# EAGLE board voice-card-controller-1_2-w-thru-hole-xtal (EAGLE 7.2.0)
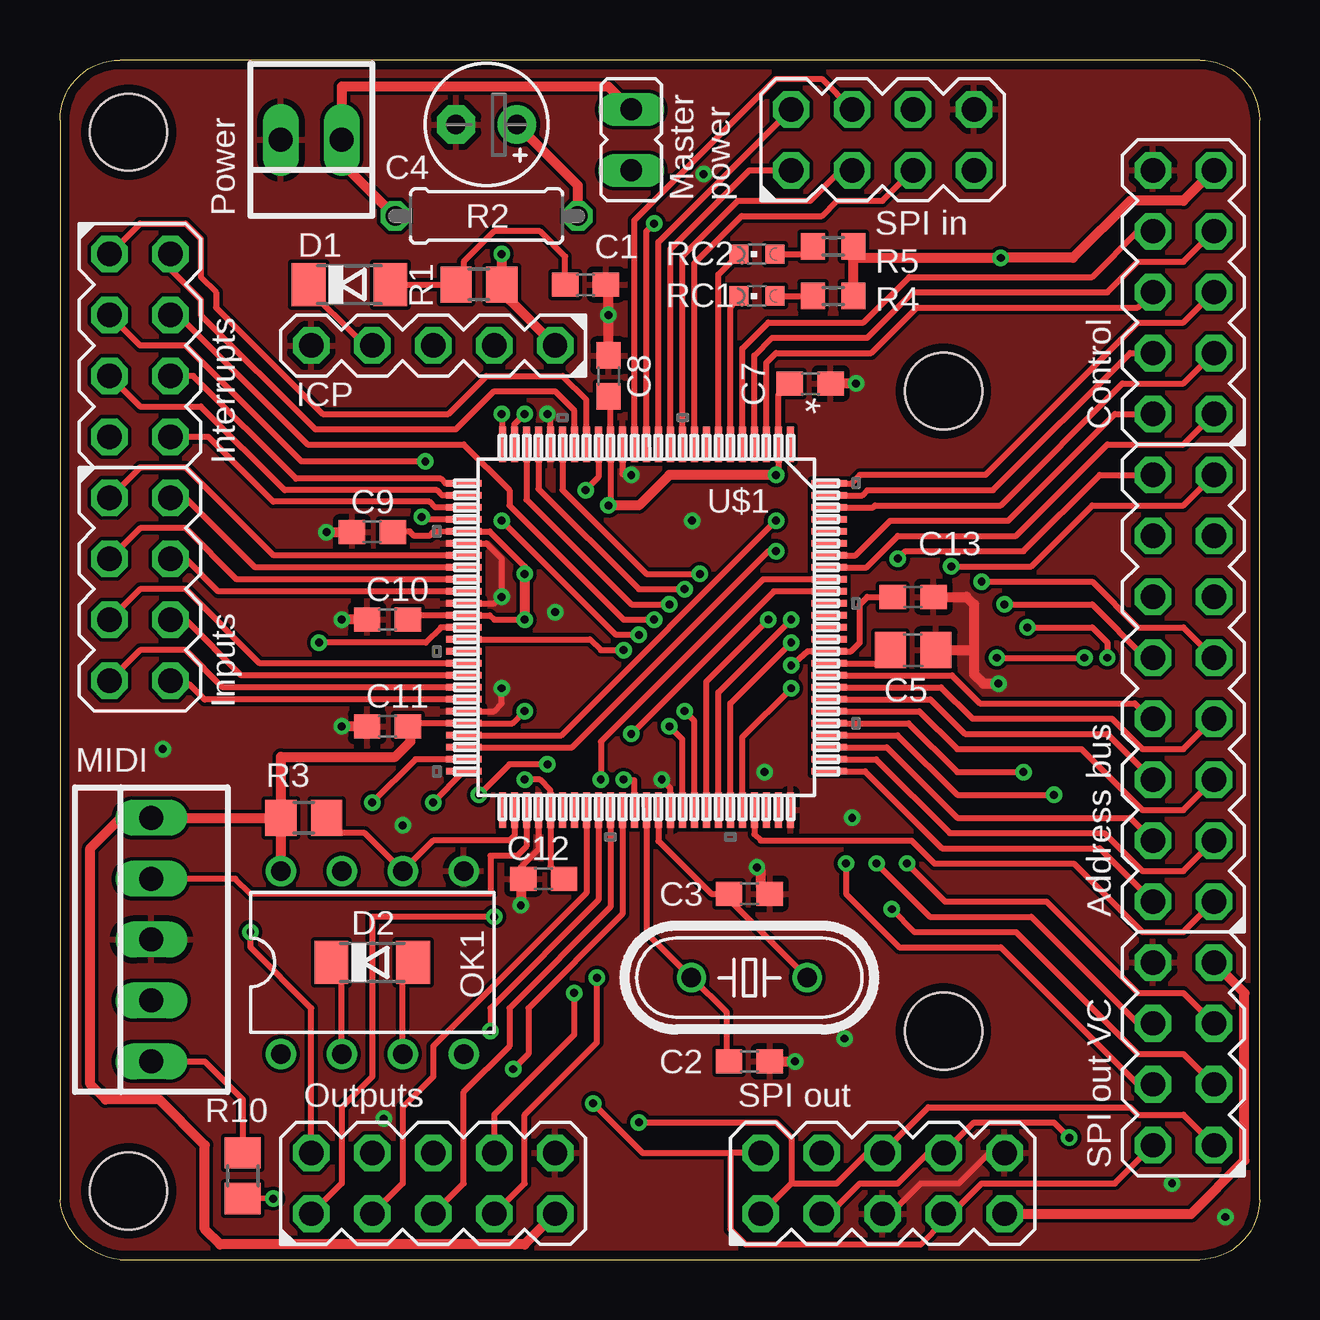
[diagram p0: board, top side]
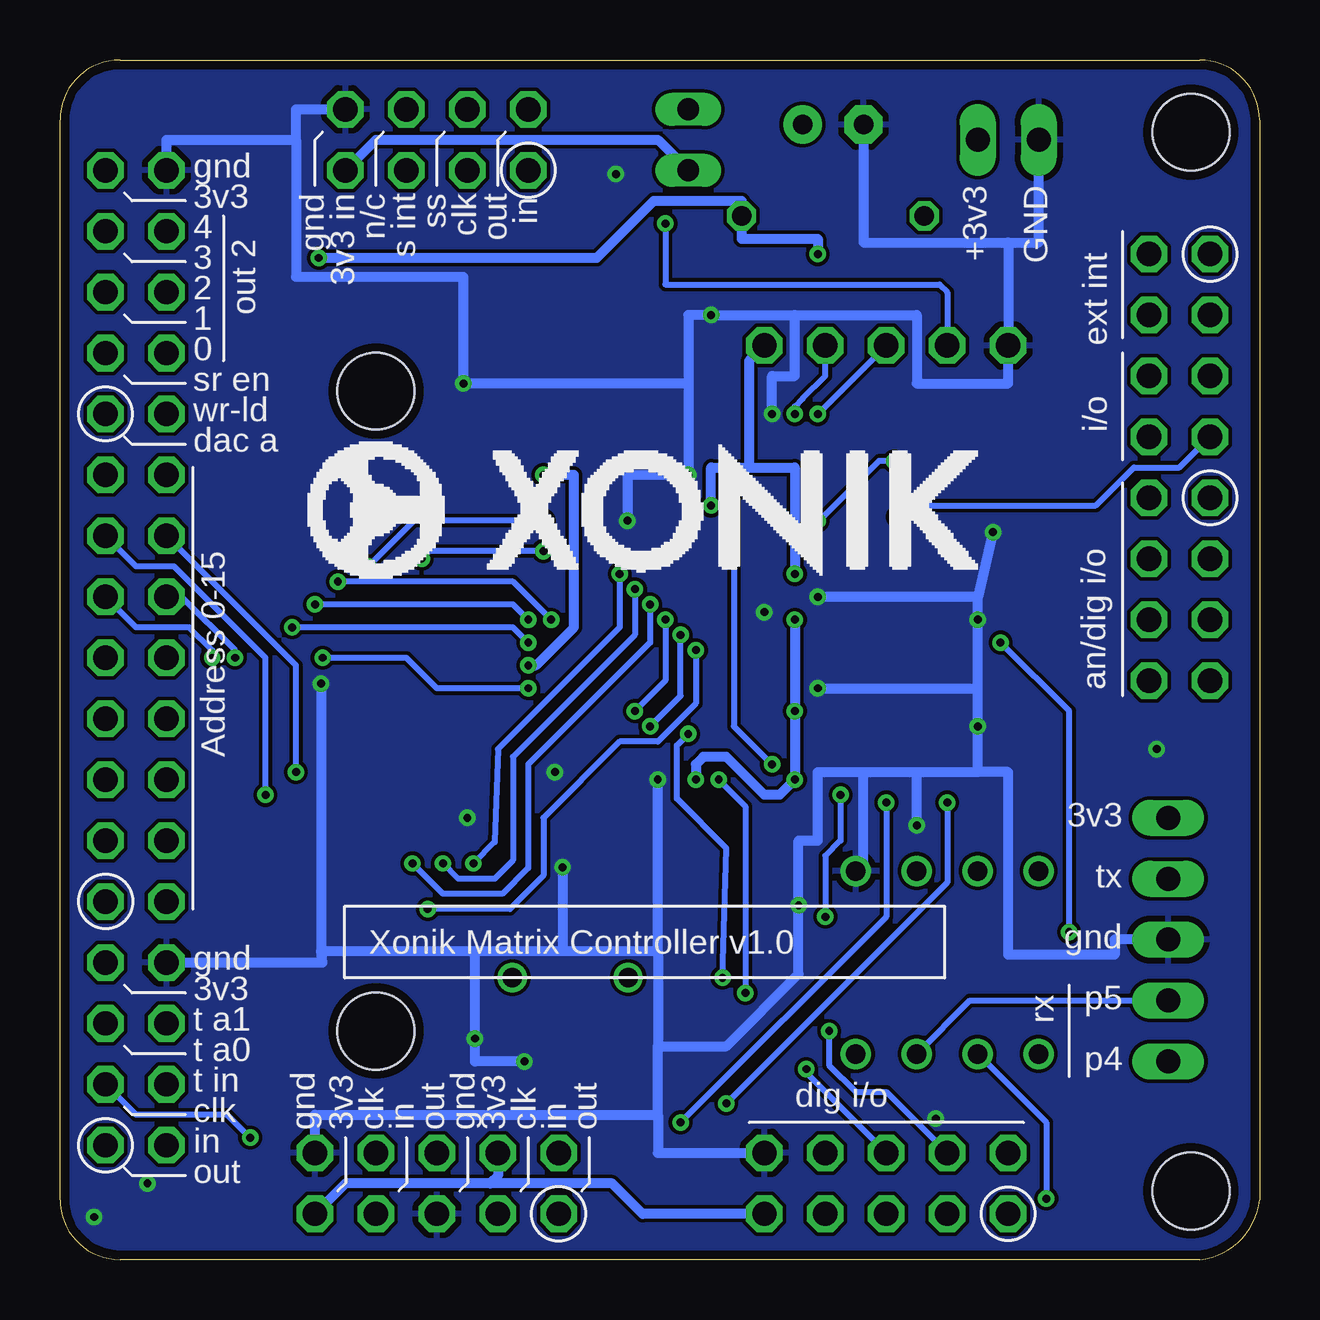
[diagram p1: board, bottom side, seen from below]

Size 50 x 50 mm. Coordinates in mm from the lower left corner, seen from the top.
Outline: 2.5,0 47.5,0 arc90 50,2.5 50,47.5 arc90 47.5,50 2.5,50 arc90 0,47.5 0,2.5 arc80 2.5,0
Copper layers (1*16): Top 0.0356mm / dielectric 1.5011mm / Bottom 0.0356mm
Design rules "oshpark-2layer": minimum track width 6mil, minimum drill 13mil, track to track 6mil, track to pad 6mil, pad to pad 6mil, via to via 6mil, smd to smd 6mil, copper to edge 15mil, drill to drill 6mil, minimum pad ring 7mil, minimum via ring 7mil, stop-mask expansion 2.5mil, vias tented up to drill 0mil, thermal gap 10mil
Holes 3.2 mm at 2.86,46.99 36.83,36.2 36.83,9.53 2.86,2.86

## Footprints (pad centres in the part's own frame; a part is rotated, then mirrored left to right if it is on the bottom)
C0603 = smd 1.1 x 1: 1 -0.85,0; 2 0.85,0
E2,5-5 = drill 0.813 pad 1.6: + -1.27,0 | drill 0.813 pad 1.6 octagon: - 1.27,0
C0805 = smd 1.3 x 1.5: 1 -0.95,0; 2 0.95,0
SOD80C = smd 1.4 x 1.8: A 1.7,0; C -1.7,0
MA08-2J = drill 1.016 octagon: 1 -8.89,-1.27; 2 -8.89,1.27; 3 -6.35,-1.27; 4 -6.35,1.27; 5 -3.81,-1.27; 6 -3.81,1.27; 7 -1.27,-1.27; 8 -1.27,1.27; 9 1.27,-1.27; 10 1.27,1.27; 11 3.81,-1.27; 12 3.81,1.27; 13 6.35,-1.27; 14 6.35,1.27; 15 8.89,-1.27; 16 8.89,1.27
MA05-2J = drill 1.016 octagon: 1 -5.08,-1.27; 2 -5.08,1.27; 3 -2.54,-1.27; 4 -2.54,1.27; 5 0,-1.27; 6 0,1.27; 7 2.54,-1.27; 8 2.54,1.27; 9 5.08,-1.27; 10 5.08,1.27
MA04-2J = drill 1.016 octagon: 1 -3.81,-1.27; 2 -3.81,1.27; 3 -1.27,-1.27; 4 -1.27,1.27; 5 1.27,-1.27; 6 1.27,1.27; 7 3.81,-1.27; 8 3.81,1.27
MA05-1 = drill 1.016 octagon: 1 -5.08,0; 2 -2.54,0; 3 0,0; 4 2.54,0; 5 5.08,0
JP1 = drill 0.914 long: 1 0,-1.27; 2 0,1.27
CHIPLED_0603 = smd 0.8 x 0.8: A 0,-0.75; C 0,0.75
22-23-2051 = drill 1 long: 1 -5.08,0; 2 -2.54,0; 3 0,0; 4 2.54,0; 5 5.08,0
DIL08-J = drill 0.813 pad 1.27: 1 -3.81,-3.81; 2 -1.27,-3.81; 3 1.27,-3.81; 4 3.81,-3.81; 5 3.81,3.81; 6 1.27,3.81; 7 -1.27,3.81; 8 -3.81,3.81
22-23-2021 = drill 1 long: 1 -1.27,0; 2 1.27,0
HC49/S = drill 0.813: 1 -2.413,0; 2 2.413,0
R0805 = smd 1.3 x 1.5: 1 -0.95,0; 2 0.95,0
0207/7 = drill 0.813 octagon: 1 -3.81,0; 2 3.81,0
R0603 = smd 1 x 1.1: 1 -0.85,0; 2 0.85,0
TQFP100_14X14MC = smd 1.473 x 0.279: 1 -7.62,6; 2 -7.62,5.5; 3 -7.62,5; 4 -7.62,4.5; 5 -7.62,4; 6 -7.62,3.5; 7 -7.62,3; 8 -7.62,2.5; 9 -7.62,2; 10 -7.62,1.5; 11 -7.62,1; 12 -7.62,0.5; 13 -7.62,0; 14 -7.62,-0.5; 15 -7.62,-1; 16 -7.62,-1.5; 17 -7.62,-2; 18 -7.62,-2.5; 19 -7.62,-3; 20 -7.62,-3.5; 21 -7.62,-4; 22 -7.62,-4.5; 23 -7.62,-5; 24 -7.62,-5.5; 25 -7.62,-6; 51 7.62,-6; 52 7.62,-5.5; 53 7.62,-5; 54 7.62,-4.5; 55 7.62,-4; 56 7.62,-3.5; 57 7.62,-3; 58 7.62,-2.5; 59 7.62,-2; 60 7.62,-1.5; 61 7.62,-1; 62 7.62,-0.5; 63 7.62,0; 64 7.62,0.5; 65 7.62,1; 66 7.62,1.5; 67 7.62,2; 68 7.62,2.5; 69 7.62,3; 70 7.62,3.5; 71 7.62,4; 72 7.62,4.5; 73 7.62,5; 74 7.62,5.5; 75 7.62,6 | smd 0.279 x 1.473: 26 -6,-7.62; 27 -5.5,-7.62; 28 -5,-7.62; 29 -4.5,-7.62; 30 -4,-7.62; 31 -3.5,-7.62; 32 -3,-7.62; 33 -2.5,-7.62; 34 -2,-7.62; 35 -1.5,-7.62; 36 -1,-7.62; 37 -0.5,-7.62; 38 0,-7.62; 39 0.5,-7.62; 40 1,-7.62; 41 1.5,-7.62; 42 2,-7.62; 43 2.5,-7.62; 44 3,-7.62; 45 3.5,-7.62; 46 4,-7.62; 47 4.5,-7.62; 48 5,-7.62; 49 5.5,-7.62; 50 6,-7.62; 76 6,7.62; 77 5.5,7.62; 78 5,7.62; 79 4.5,7.62; 80 4,7.62; 81 3.5,7.62; 82 3,7.62; 83 2.5,7.62; 84 2,7.62; 85 1.5,7.62; 86 1,7.62; 87 0.5,7.62; 88 0,7.62; 89 -0.5,7.62; 90 -1,7.62; 91 -1.5,7.62; 92 -2,7.62; 93 -2.5,7.62; 94 -3,7.62; 95 -3.5,7.62; 96 -4,7.62; 97 -4.5,7.62; 98 -5,7.62; 99 -5.5,7.62; 100 -6,7.62

## Placement (x,y rotation side)
C1  100nF  [C0603]  21.91,40.64 180 top
C2  18pF  [C0603]  28.73,8.26 0 top
C3  18pF  [C0603]  28.73,15.24 0 top
C4  22uF 25V  [E2,5-5]  17.78,47.31 180 top
C5  10uF  [C0805]  35.56,25.4 180 top
C7  100nF  [C0603]  31.27,36.51 180 top
C8  100nF  [C0603]  22.86,36.83 270 top
C9  100nF  [C0603]  13.02,30.32 0 top
C10  100nF  [C0603]  13.65,26.67 0 top
C11  100nF  [C0603]  13.65,22.23 0 top
C12  100nF  [C0603]  20.16,15.88 0 top
C13  100nF  [C0603]  35.56,27.62 180 top
D1  [SOD80C]  12.06,40.64 0 top
D2  [SOD80C]  13.02,12.38 0 top
DAC-ADR  [MA08-2J]  46.83,23.81 90 top
DAC-CTRL  [MA05-2J]  46.83,40.32 90 top
DIG-IN  [MA04-2J]  3.33,27.94 270 top
DIG-OUT  [MA05-2J]  15.56,3.17 0 top
ICP  [MA05-1]  15.56,38.1 180 top
INTERRUPTS  [MA04-2J]  3.33,38.1 270 top
JP1  [JP1]  23.81,46.67 0 top
LED1  [CHIPLED_0603]  29.05,40.16 90 top
LED2  [CHIPLED_0603]  29.05,41.91 90 top
MIDI  22-23-2051  [22-23-2051]  3.81,13.34 90 top
OK1  6N137J  [DIL08-J]  13.02,12.38 0 top
POWER  22-23-2021  [22-23-2021]  10.48,46.67 180 top
Q4  [HC49/S]  28.73,11.75 180 top
R1  10k  [R0805]  17.46,40.64 0 top
R2  10R  [0207/7]  17.78,43.5 180 top
R3  220R  [R0805]  10.16,18.41 180 top
R4  220R  [R0603]  32.23,40.16 0 top
R5  220R  [R0603]  32.23,42.23 0 top
R10  220R  [R0805]  7.62,3.49 270 top
SPI-IN  [MA04-2J]  34.29,46.67 0 top
SPI-OUT  [MA05-2J]  34.29,3.17 0 top
SPI-OUT-VC  [MA04-2J]  46.83,8.57 90 top
U$1  PIC32MX795F512L-X_PF  [TQFP100_14X14MC]  24.45,26.35 270 top

## Library data of the parts
C1-C5 C7-C13 R1-R5 R10 = resistor
D1 D2 = diode
DAC-ADR DAC-CTRL DIG-IN DIG-OUT ICP INTERRUPTS SPI-IN SPI-OUT SPI-OUT-VC = joakim; OC_FARNELL: unknown; OC_NEWARK: unknown
JP1 = jumper
LED1 LED2 = led
MIDI = con-molex; MF: MOLEX; MPN: 22-23-2051; OC_FARNELL: 1462952; OC_NEWARK: 38C9178
OK1 = joakim
POWER = con-molex; MF: MOLEX; MPN: 22-23-2021; OC_FARNELL: 1462926; OC_NEWARK: 25C3832
Q4 = crystal; OC_FARNELL: 1667008; OC_NEWARK: unknown
U$1 = pic32mx-795F-512L

## Nets
+3V3: C4.+ C7.2 C8.2 C9.2 C10.2 C11.2 C12.2 C13.2 DAC-CTRL.9 DIG-OUT.9 ICP.1 MIDI.5 OK1.8 R1.2 R2.1 R3.2 R4.2 R5.2 SPI-OUT-VC.7 SPI-OUT.4 SPI-OUT.9 U$1.2 U$1.16 U$1.30 U$1.37 U$1.46 U$1.55 U$1.62 U$1.86
DAC-A: DAC-CTRL.1 U$1.93
DAC-A0: DAC-ADR.1 U$1.72
DAC-A1: DAC-ADR.2 U$1.76
DAC-A2: DAC-ADR.3 U$1.77
DAC-A3: DAC-ADR.4 U$1.78
DAC-A4: DAC-ADR.5 U$1.81
DAC-A5: DAC-ADR.6 U$1.82
DAC-A6: DAC-ADR.7 U$1.83
DAC-A7: DAC-ADR.8 U$1.84
DAC-A8: DAC-ADR.9 U$1.68
DAC-A9: DAC-ADR.10 U$1.69
DAC-A10: DAC-ADR.11 U$1.70
DAC-A11: DAC-ADR.12 U$1.71
DAC-A12: DAC-ADR.13 U$1.79
DAC-A13: DAC-ADR.14 U$1.80
DAC-A14: DAC-ADR.15 U$1.47
DAC-A15: DAC-ADR.16 U$1.48
DAC-WR-LD: DAC-CTRL.2 U$1.94
DIG-IN0: DIG-IN.1 U$1.32
DIG-IN1: DIG-IN.2 U$1.33
DIG-IN2: DIG-IN.3 U$1.34
DIG-IN2-0: INTERRUPTS.5 U$1.27
DIG-IN2-1: INTERRUPTS.6 U$1.26
DIG-IN2-2: INTERRUPTS.7 U$1.29
DIG-IN2-3: INTERRUPTS.8 U$1.28
DIG-IN3: DIG-IN.4 U$1.35
DIG-IN4: DIG-IN.5 U$1.41
DIG-IN5: DIG-IN.6 U$1.42
DIG-IN6: DIG-IN.7 U$1.43
DIG-IN7: DIG-IN.8 U$1.44
DIG-OUT0: DIG-OUT.1 U$1.17
DIG-OUT1: DIG-OUT.2 U$1.38
DIG-OUT2: DIG-OUT.3 U$1.58
DIG-OUT2-0: DAC-CTRL.4 U$1.99
DIG-OUT2-1: DAC-CTRL.5 U$1.100
DIG-OUT2-2: DAC-CTRL.6 U$1.3
DIG-OUT2-3: DAC-CTRL.7 U$1.4
DIG-OUT2-4: DAC-CTRL.8 U$1.5
DIG-OUT3: DIG-OUT.4 U$1.59
DIG-OUT4: DIG-OUT.5 U$1.60
DIG-OUT5: DIG-OUT.6 U$1.61
DIG-OUT6: DIG-OUT.7 U$1.91
DIG-OUT7: DIG-OUT.8 U$1.92
GND: C1.1 C2.2 C3.2 C4.- C5.1 C7.1 C8.1 C9.1 C10.1 C11.1 C12.1 C13.1 DAC-CTRL.10 DIG-OUT.10 ICP.5 MIDI.3 OK1.5 POWER.2 SPI-IN.8 SPI-OUT-VC.8 SPI-OUT.5 SPI-OUT.10 U$1.15 U$1.21 U$1.31 U$1.36 U$1.45 U$1.54 U$1.65 U$1.75
INT1: INTERRUPTS.1 U$1.18
INT2: INTERRUPTS.2 U$1.19
INT3: INTERRUPTS.3 U$1.66
INT4: INTERRUPTS.4 U$1.67
MCLR: D1.C ICP.4 U$1.13
MIDI-IN4: MIDI.1 R10.1
MIDI-IN5: D2.A MIDI.2 OK1.3
MIDI-RX: OK1.6 R3.1 U$1.52
MIDI-TX: MIDI.4 U$1.53
N$1: C5.2 U$1.85
N$2: JP1.1 SPI-IN.7
N$3: LED1.A R4.1
N$4: C1.2 D1.A R1.1
N$5: D2.C OK1.2 R10.2
N$6: LED1.C U$1.6
N$7: LED2.C U$1.7
N$8: LED2.A R5.1
OSC1: C2.1 Q4.2 U$1.63
OSC2: C3.1 Q4.1 U$1.64
PGC: ICP.2 U$1.24
PGD: ICP.3 U$1.25
POWER-IN: JP1.2 POWER.1 R2.2
SCLK-IN: SPI-IN.3 U$1.10
SCLK-OUT: SPI-OUT-VC.3 SPI-OUT.3 SPI-OUT.8 U$1.39
SDI-IN: SPI-IN.1 U$1.11
SDI-OUT: SPI-OUT-VC.2 SPI-OUT.2 SPI-OUT.7 U$1.49
SDO-IN: SPI-IN.2 U$1.12
SDO-OUT: SPI-OUT-VC.1 SPI-OUT.1 SPI-OUT.6 U$1.50
SLAVE-INT: SPI-IN.5 U$1.9
SR-EN: DAC-CTRL.3 U$1.98
SS-IN: SPI-IN.4 U$1.14
TUNE-A0: SPI-OUT-VC.5 U$1.23
TUNE-A1: SPI-OUT-VC.6 U$1.22
TUNE-IN: SPI-OUT-VC.4 U$1.20

## Tracks (layer width: path | path; a pad name or v marks a point on that pad's centre or on a via)
+3V3  (via drill 0.33)
  Top 0.254: v19.37,28.57 19.37,28.89 17.91,30.35 U$1.30 15.56,30.32 15.4,30.16 14.76,30.16 14.57,30.35 14.5,30.35 C9.2 | C10.2 14.5,26.85 U$1.37 17.91,26.85 18.1,26.67 v19.37,26.67 | C11.2 14.5,22.35 U$1.46 18.86,22.35 v19.37,22.86 | C12.2 20.45,16.38 U$1.55 20.45,19.56 20,20 v19.37,20 | C8.2 22.95,35.89 U$1.16 22.95,31.43 v22.86,31.43 | v29.84,32.7 29.95,32.8 U$1.2 29.95,36.04 C7.2 | U$1.62 23.95,19.98 v23.5,20 | v30.48,24.77 31.16,25.35 U$1.86 32.97,25.35 33.34,25.72 33.34,27.3 33.66,27.62 C13.2
  Top 0.406: DAC-CTRL.9 46.83,44.13 44.61,44.13 42.23,41.75 v39.21,41.75 33.02,41.75 33.08,42.28 R4.2 R5.2 | v29.84,32.7 25.4,32.7 24.13,31.43 v22.86,31.43 | v19.37,28.57 v19.37,26.67 | R3.2 MIDI.5 2.54,18.41 1.27,17.14 1.27,7.3 1.91,6.67 4.13,6.67 6.03,4.76 6.03,1.27 6.67,0.64 19.37,0.64 DIG-OUT.9 | 9.21,18.1 OK1.8 | R3.2 | R3.2 9.21,18.1 | 9.21,18.1 R3.2 | R3.2 9.21,20.95 13.97,20.95 14.61,21.59 14.61,22.12 C11.2 | v18.41,41.91 R1.2 18.73,40.32 18.73,40.01 ICP.1 | R2.1 21.59,44.77 C4.+ | SPI-OUT.9 47.15,1.91 49.37,4.13 49.37,11.11 SPI-OUT-VC.7
  Bottom 0.406: v39.21,41.75 27.62,41.75 25.24,44.13 21.59,44.13 R2.1 21.59,42.55 18.41,42.55 v18.41,41.91 | v30.48,24.77 30.16,24.77 28.57,26.35 28.57,32.7 v29.84,32.7 | v22.86,31.43 22.86,33.02 21.27,33.02 | 21.27,33.02 19.37,33.02 v19.37,28.57 | v19.37,26.67 v19.37,22.86 v19.37,20 20,19.37 20.64,19.37 22.23,20.95 23.18,20.95 23.5,20.64 v23.5,20 | ICP.1 21.27,37.47 21.27,33.02 | DIG-OUT.9 25.72,1.91 26.99,3.17 32.07,3.17 | 32.07,3.17 38.1,3.17 SPI-OUT.9 | SPI-OUT.4 31.75,3.49 32.07,3.17
DAC-A
  Top 0.254: U$1.93 33.62,28.85 34.92,30.16 39.85,30.16 43.66,33.97 46.83,33.97 DAC-CTRL.1
DAC-A0
  Top 0.254: U$1.72 28.95,17.73 29.21,17.46 35.5,17.46 36.45,16.51 42.26,16.51 45.12,13.65 46.83,13.65 DAC-ADR.1
DAC-A1
  Top 0.254: U$1.76 33.56,20.35 36.77,17.14 43.34,17.14 DAC-ADR.2
DAC-A2
  Top 0.254: U$1.77 34.01,20.85 37.08,17.78 43.53,17.78 45.12,16.19 46.83,16.19 DAC-ADR.3
DAC-A3
  Top 0.254: U$1.78 34.46,21.35 37.4,18.41 44.61,18.41 DAC-ADR.4
DAC-A4
  Top 0.254: U$1.81 35.82,22.85 37.4,21.27 42.58,21.27 45.12,18.73 46.83,18.73 DAC-ADR.5
DAC-A5
  Top 0.254: U$1.82 36.27,23.35 37.72,21.91 43.66,21.91 DAC-ADR.6
DAC-A6
  Top 0.254: U$1.83 36.73,23.85 38.04,22.54 43.85,22.54 45.12,21.27 46.83,21.27 DAC-ADR.7
DAC-A7
  Top 0.254: U$1.84 37.18,24.35 38.35,23.18 44.8,23.18 45.43,22.54 DAC-ADR.8
DAC-A8  (via drill 0.33)
  Top 0.254: U$1.68 26.95,24.09 v29.53,26.67 | v38.42,28.26 43.02,28.26 44.93,26.35 46.83,26.35 DAC-ADR.9
  Bottom 0.254: v29.53,26.67 31.11,28.26 v38.42,28.26
DAC-A9  (via drill 0.33)
  Top 0.254: U$1.69 27.45,23.64 v30.48,26.67 | v39.37,27.3 43.02,27.3 45.24,25.08 DAC-ADR.10
  Bottom 0.254: v30.48,26.67 31.11,27.3 v39.37,27.3
DAC-A10  (via drill 0.33)
  Top 0.254: U$1.70 27.95,23.18 v30.48,25.72 | v40.32,26.35 43.02,26.35 43.66,25.72 v43.66,25.08
  Bottom 0.254: v30.48,25.72 31.11,26.35 v40.32,26.35 | v43.66,25.08 43.66,25.4 44.61,26.35 46.83,26.35 DAC-ADR.11
DAC-A11  (via drill 0.33)
  Top 0.254: U$1.71 28.45,21.78 v30.48,23.81 | v39.05,25.08 v42.7,25.08
  Bottom 0.254: v30.48,23.81 34.29,23.81 35.56,25.08 v39.05,25.08 | v42.7,25.08 42.7,25.4 44.93,27.62 DAC-ADR.12
DAC-A12  (via drill 0.33)
  Top 0.254: U$1.79 34.92,21.85 37.4,19.37 v41.43,19.37
  Bottom 0.254: v41.43,19.37 41.43,25.08 45.24,28.89 46.83,28.89 DAC-ADR.13
DAC-A13  (via drill 0.33)
  Top 0.254: U$1.80 35.37,22.35 37.4,20.32 v40.16,20.32
  Bottom 0.254: v40.16,20.32 40.16,24.77 DAC-ADR.14
DAC-A14  (via drill 0.33)
  Top 0.254: v29.84,30.8 20.9,21.85 U$1.47 | v37.15,28.89 40.48,28.89 43.02,31.43 46.83,31.43 DAC-ADR.15
  Bottom 0.254: v29.84,30.8 35.24,30.8 v37.15,28.89
DAC-A15  (via drill 0.33)
  Top 0.254: v29.84,29.53 29.53,29.53 21.35,21.35 U$1.48 | v34.92,29.21 35.24,29.53 40.16,29.53 43.34,32.7 DAC-ADR.16
  Bottom 0.254: v29.84,29.53 34.61,29.53 v34.92,29.21
DAC-WR-LD
  Top 0.254: U$1.94 33.16,29.35 34.61,30.8 39.53,30.8 43.97,35.24 DAC-CTRL.2
DIG-IN0
  Top 0.254: U$1.32 8.91,29.35 5.24,33.02 3.33,33.02 DIG-IN.1
DIG-IN1
  Top 0.254: U$1.33 8.14,28.85 5.24,31.75 DIG-IN.2
DIG-IN2
  Top 0.254: U$1.34 7.37,28.35 5.24,30.48 3.33,30.48 DIG-IN.3
DIG-IN2-0
  Top 0.254: INTERRUPTS.5 3.33,35.56 5.87,35.56 9.37,32.07 15.72,32.07 15.93,31.85 U$1.27
DIG-IN2-1
  Top 0.254: U$1.26 16.07,32.35 15.88,32.54 9.84,32.54 5.56,36.83 INTERRUPTS.6
DIG-IN2-2  (via drill 0.33)
  Top 0.254: U$1.29 15.03,30.85 v15.08,30.96
  Bottom 0.254: v15.08,30.96 14.61,31.43 6.83,31.43 5.24,33.02 3.33,33.02 INTERRUPTS.7
DIG-IN2-3
  Top 0.254: U$1.28 15.64,31.35 15.4,31.59 8.89,31.59 6.19,34.29 INTERRUPTS.8
DIG-IN3
  Top 0.254: U$1.35 6.6,27.85 5.24,29.21 DIG-IN.4
DIG-IN4
  Top 0.254: U$1.41 8.33,24.85 5.24,27.94 3.33,27.94 DIG-IN.5
DIG-IN5
  Top 0.254: U$1.42 7.56,24.35 5.24,26.67 DIG-IN.6
DIG-IN6
  Top 0.254: U$1.43 6.79,23.85 5.24,25.4 3.33,25.4 DIG-IN.7
DIG-IN7
  Top 0.254: U$1.44 6.03,23.34 5.38,23.99 4.78,23.99 DIG-IN.8
DIG-OUT0  (via drill 0.33)
  Top 0.254: U$1.17 22.45,32.61 v21.91,32.07 | v20.32,20.64 18.73,20.64 v17.46,19.37 | v18.1,14.29 13.02,14.29 13.02,7.62 11.75,6.35 11.75,3.17 DIG-OUT.1
  Bottom 0.254: v21.91,32.07 21.91,22.23 v20.32,20.64 | v17.46,19.37 17.46,17.46 18.1,16.83 v18.1,14.29
DIG-OUT1  (via drill 0.33)
  Top 0.254: U$1.38 15.88,26.35 15.24,25.72 v10.79,25.72 | DIG-OUT.2 10.48,10.48 7.94,13.02 v7.94,13.65
  Bottom 0.254: v7.94,13.65 7.94,22.86 v10.79,25.72
DIG-OUT2
  Top 0.254: U$1.58 21.95,15.28 15.56,8.89 15.56,7.62 14.29,6.35 14.29,3.17 DIG-OUT.3
DIG-OUT2-0
  Top 0.254: U$1.99 33.44,31.85 33.66,32.07 38.89,32.07 44.61,37.78 DAC-CTRL.4
DIG-OUT2-1
  Top 0.254: U$1.100 32.99,32.35 33.34,32.7 38.58,32.7 44.93,39.05 46.83,39.05 DAC-CTRL.5
DIG-OUT2-2
  Top 0.254: U$1.3 29.45,37.38 29.84,37.78 33.81,37.78 35.72,39.69 44.93,39.69 DAC-CTRL.6
DIG-OUT2-3
  Top 0.254: U$1.4 28.95,37.68 29.69,38.42 33.66,38.42 35.56,40.32 43.66,40.32 44.93,41.59 46.83,41.59 DAC-CTRL.7
DIG-OUT2-4
  Top 0.254: DAC-CTRL.8 44.93,42.86 43.02,40.96 35.4,40.96 33.5,39.05 29.53,39.05 28.45,37.97 U$1.5
DIG-OUT3  (via drill 0.33)
  Top 0.254: U$1.59 22.45,14.99 17.94,10.48 v17.94,9.53
  Bottom 0.254: v17.94,9.53 17.94,8.1 16.83,6.99 15.56,6.99 DIG-OUT.4
DIG-OUT4
  Top 0.254: U$1.60 22.95,14.69 18.73,10.48 18.73,8.89 16.83,6.99 16.83,3.17 DIG-OUT.5
DIG-OUT5  (via drill 0.33)
  Top 0.254: U$1.61 23.45,14.4 19.53,10.48 19.53,8.57 v18.89,7.94
  Bottom 0.254: v18.89,7.94 18.89,7.78 DIG-OUT.6
DIG-OUT6  (via drill 0.33)
  Top 0.254: U$1.91 29.76,27.85 v23.81,21.91 | DIG-OUT.7 19.37,3.17 19.37,6.03 22.38,9.05 v22.38,11.75
  Bottom 0.254: v22.38,11.75 22.23,17.14 24.29,19.21 24.29,21.43 v23.81,21.91
DIG-OUT7  (via drill 0.33)
  Top 0.254: v22.54,20 22.54,21.59 29.3,28.35 U$1.92 | v21.43,11.11 21.43,9.37 18.1,6.03 DIG-OUT.8
  Bottom 0.254: v22.54,20 21.43,18.89 v21.43,11.11
GND  (via drill 0.33, 0.33 pad 0.41)
  Top 0.254: U$1.36 18.1,27.35 v18.41,27.62 18.41,29.21 17.77,29.85 U$1.31 | U$1.45 18.09,22.85 18.41,23.18 v18.41,23.81 | U$1.15 23.45,32.75 v23.81,32.7 | SPI-OUT.5 34.61,1.91 35.88,3.17 37.47,3.17 38.73,4.45 SPI-OUT.10 | U$1.65 25.45,19.64 v25.08,20 | U$1.21 20.45,35.12 v20.32,35.24 | C3.2 29.53,15.24 29.21,15.56 | U$1.54 19.95,17.09 19.21,16.35 19.21,15.98 C12.1
  Top 0.406: C8.1 v22.86,39.37 22.86,40.54 C1.1 | v33.18,36.51 C7.1 | v11.11,30.32 C9.1 | C10.1 v11.75,26.67 | C11.1 v11.75,22.23 | C12.1 19.21,15.88 v19.21,14.76 | C13.1 37.78,27.62 38.1,27.3 38.1,25.4 | 38.1,25.4 38.1,24.38 38.48,24 v39.12,24 | C5.1 38.1,25.4 | 29.21,15.56 29.21,16.19 v29.05,16.35 | C2.2 v30.64,8.26
  Bottom 0.406: 23.81,36.51 23.81,39.37 v22.86,39.37 19.37,39.37 | 23.81,36.51 v33.18,36.51 33.18,40.96 40.16,40.96 40.16,46.67 | 19.37,39.37 14.29,39.37 14.29,36.51 10.48,36.51 ICP.5 10.48,42.39 | v11.75,26.67 11.75,27.62 | v11.75,26.67 v11.75,22.23 11.75,20.32 | 16.51,20.32 18.41,20.32 18.41,17.46 19.21,17.46 v19.21,14.76 19.21,11.91 22.23,8.89 25.08,8.89 | 16.51,20.32 14.29,20.32 | 14.29,20.32 11.75,20.32 | v39.12,24 39.12,12.86 | 39.12,12.86 32.7,12.86 | 32.7,12.86 29.05,12.86 | 29.05,12.86 25.08,12.86 | 25.08,12.86 25.08,8.89 | 40.16,46.67 40.16,47.94 SPI-IN.8 | DAC-CTRL.10 45.56,46.67 40.16,46.67 | SPI-OUT-VC.8 39.05,12.38 39.12,12.86 | OK1.5 16.51,16.51 16.51,20.32 | C4.- 16.51,42.39 10.48,42.39 | 10.48,42.39 9.21,42.39 POWER.2 | 23.81,36.51 v23.81,32.7 26.35,32.7 v26.35,30.8 | v20.32,35.24 20.32,36.83 19.37,36.83 19.37,39.37 | 25.08,12.86 v25.08,20 | MIDI.3 6.03,13.34 6.03,12.7 10.48,12.7 10.48,20.32 11.75,20.32 | 25.08,6.03 25.08,4.45 DIG-OUT.10 | SPI-OUT.10 39.37,6.03 25.08,6.03 | v18.41,23.81 11.75,23.81 v11.75,26.67 | 11.75,27.62 v18.41,27.62 | v11.11,30.32 11.75,27.62 | v32.7,9.21 32.7,12.86 | 32.64,9.14 v32.7,9.21 | v29.05,16.35 29.05,12.86 | v30.64,8.26 32.7,8.26 v32.7,9.21 | 25.08,6.03 25.08,8.89 | v14.29,18.1 14.29,20.32
  other vias: 29.37,20.32 4.29,21.27 26.83,45.24 13.49,5.87 48.58,1.77 46.35,3.17 20.64,26.99 33.02,18.41
  pour Bottom: -0.64,50.48 50.16,50.48 50.16,0 -1.14,-0.5
  pour Top: 50.8,-0.32 51.12,-0.32 51.12,49.85 0,49.85 -0.5,-1.64 50.8,-0.64
INT1
  Top 0.254: INTERRUPTS.1 3.33,43.18 5.24,43.18 5.87,42.55 5.87,40.96 6.51,40.32 6.51,39.69 10.95,35.24 16.19,35.24 17.78,36.83 20.95,36.83 21.95,35.84 U$1.18
INT2
  Top 0.254: INTERRUPTS.2 4.6,41.27 5.87,40.01 5.87,39.37 10.64,34.61 16.51,34.61 18.1,36.2 20.64,36.2 21.45,35.38 U$1.19
INT3  (via drill 0.33)
  Top 0.254: U$1.66 25.95,21.68 v25.4,22.23 | v24.13,26.04 23.18,26.04 v18.41,30.8 | INTERRUPTS.3 3.33,38.1 5.24,38.1 10.07,33.27 v15.23,33.27
  Bottom 0.254: v24.13,26.04 24.13,23.5 v25.4,22.23 | v18.41,30.8 18.35,30.8 15.85,33.3 15.26,33.3 v15.23,33.27
INT4  (via drill 0.33)
  Top 0.254: INTERRUPTS.4 4.92,39.37 10.32,33.97 16.83,33.97 18.73,32.07 18.73,31.43 23.5,26.67 v24.77,26.67 | U$1.67 26.45,22.45 v26.04,22.86
  Bottom 0.254: v24.77,26.67 24.77,24.13 v26.04,22.86
MCLR  (via drill 0.33)
  Top 0.254: U$1.13 24.45,42.86 v24.77,43.18 | D1.C 10.37,40.44 12.38,38.42 12.7,38.42 ICP.4
  Bottom 0.254: v24.77,43.18 24.77,40.64 13.34,40.64 13.02,40.32 ICP.4
MIDI-IN4
  Top 0.254: MIDI.1 6.03,8.26 7.62,6.67 R10.1
MIDI-IN5
  Top 0.254: OK1.3 14.29,11.95 D2.A
  Bottom 0.254: OK1.3 12.06,10.79 MIDI.2
MIDI-RX
  Top 0.254: U$1.52 18.95,17.68 18.73,17.46 15.56,17.46 OK1.6 12.7,17.78 11.11,17.78 R3.1
MIDI-TX
  Top 0.254: U$1.53 19.45,17.23 19.05,16.83 17.94,16.83 17.94,15.24 7.94,15.24 7.3,15.88 MIDI.4
N$1
  Top 0.254: U$1.85 34.16,24.85 C5.2
N$2
  Bottom 0.406: SPI-IN.7 36.83,46.67 25.08,46.67 JP1.1
N$3
  Top 0.254: LED1.A R4.1
N$4
  Top 0.254: D1.A R1.1 16.83,40.33 16.83,41.59 18.1,42.86 20,42.86 21.06,41.81 C1.2
N$5  (via drill 0.33)
  Top 0.254: OK1.2 11.75,11.95 D2.C | v8.89,2.54 R10.2
  Bottom 0.254: OK1.2 8.89,5.71 v8.89,2.54
N$6
  Top 0.254: U$1.6 27.95,39.65 LED1.C
N$7
  Top 0.254: U$1.7 27.45,41.06 LED2.C
N$8
  Top 0.254: LED2.A 31.22,41.91 R5.1
OSC1
  Top 0.254: U$1.63 24.45,13.62 Q4.2 26.35,11.75 27.78,10.32 27.78,8.36 C2.1
OSC2
  Top 0.254: U$1.64 24.95,17.44 27.15,15.24 C3.1 27.88,15.01 Q4.1
PGC  (via drill 0.33)
  Top 0.254: U$1.24 18.95,34.82 v19.37,35.24
  Bottom 0.254: v19.37,35.24 19.37,35.56 19.05,35.88 18.1,36.83 ICP.2
PGD  (via drill 0.33)
  Top 0.254: U$1.25 18.45,34.89 v18.41,35.24
  Bottom 0.254: v18.41,35.24 ICP.3
POWER-IN
  Top 0.406: R2.2 11.75,45.72 POWER.1 11.75,48.9 22.86,48.9 JP1.2
SCLK-IN
  Top 0.254: U$1.10 25.95,41.82 28.26,44.13 31.27,44.13 32.54,45.4 SPI-IN.3
SCLK-OUT  (via drill 0.33)
  Top 0.254: U$1.39 22.09,25.85 22.54,25.4 v23.5,25.4 | v34.67,14.61 35.62,13.65 39.85,13.65 44.93,8.57 46.83,8.57 SPI-OUT-VC.3 | SPI-OUT.3 32.07,1.91 33.34,3.17 34.92,3.17 36.2,4.45 SPI-OUT.8 38.1,5.71 41.43,5.71 v42.07,5.08
  Bottom 0.254: v23.5,25.4 23.5,23.18 25.08,21.59 26.67,21.59 29.84,18.41 29.84,16 31.24,14.61 v34.67,14.61 | v42.07,5.08 43.02,6.03 46.83,6.03 SPI-OUT-VC.3
SDI-IN
  Top 0.254: U$1.11 25.45,42.12 28.73,45.4 SPI-IN.1
SDI-OUT  (via drill 0.33)
  Top 0.254: U$1.49 14.82,20.85 v13.02,19.05 | v22.23,6.51 24.29,4.45 27.94,4.45 | SPI-OUT.2 27.94,4.45 | 27.94,4.45 27.94,1.27 28.57,0.64 35.88,0.64 36.83,1.59 SPI-OUT.7 37.15,1.91 38.42,3.17 43.97,3.17 SPI-OUT-VC.2
  Bottom 0.254: v13.02,19.05 13.02,15.72 v22.23,6.51
SDO-IN
  Top 0.254: U$1.12 24.95,42.41 SPI-IN.2
SDO-OUT  (via drill 0.33)
  Top 0.254: U$1.50 v15.56,19.05 | v24.13,5.71 29.84,5.71 30.48,5.08 30.48,3.17 | SPI-OUT.1 30.48,3.17 | 30.48,3.17 32.38,3.17 33.66,4.45 SPI-OUT.6 36.2,6.35 44.61,6.35 44.93,6.03 46.83,6.03 SPI-OUT-VC.1
  Bottom 0.254: v15.56,19.05 15.56,14.29 v24.13,5.71
SLAVE-INT
  Top 0.254: U$1.9 26.45,41.53 28.42,43.5 31.75,43.5 32.38,44.13 34.29,44.13 SPI-IN.5 35.24,45.4
SR-EN
  Top 0.254: DAC-CTRL.3 46.83,36.51 44.29,36.51 39.21,31.43 33.97,31.43 33.89,31.35 U$1.98
SS-IN
  Top 0.254: U$1.14 23.95,43.31 29.84,49.21 31.75,49.21 SPI-IN.4
TUNE-A0  (via drill 0.33)
  Top 0.254: U$1.23 19.45,31.67 23.81,27.3 v25.4,27.3 | v35.31,16.51 36.89,14.92 41.12,14.92 44.93,11.11 46.83,11.11 SPI-OUT-VC.5
  Bottom 0.254: v25.4,27.3 25.4,25.72 30.48,20.64 30.48,16.32 31.56,15.24 34.04,15.24 v35.31,16.51
TUNE-A1  (via drill 0.33)
  Top 0.254: U$1.22 19.95,32.12 24.13,27.94 v26.04,27.94 | v34.04,16.51 36.26,14.29 40.48,14.29 44.93,9.84 SPI-OUT-VC.6
  Bottom 0.254: v26.04,27.94 26.04,26.04 31.11,20.95 31.11,16.64 31.88,15.88 33.4,15.88 v34.04,16.51
TUNE-IN  (via drill 0.33)
  Top 0.254: U$1.20 20.95,32.08 24.45,28.57 v26.67,28.57 | v32.77,16.51 32.77,15.24 34.99,13.02 39.21,13.02 44.93,7.3 SPI-OUT-VC.4
  Bottom 0.254: v26.67,28.57 26.67,26.35 31.75,21.27 31.88,17.4 v32.77,16.51

## Text on the board
tNames: Master / power | Power | SPI in | RC2 | RC1 | ICP | Control | Interrupts | Inputs | MIDI | Address bus | Outputs | SPI out | SPI out VC
bNames: GND | +3v3 | gnd | in | out | clk | ss | s int | n/c | 3v3 in | gnd | 3v3 | out 2 | 4 | 3 | 2 | 1 | ext int | 0 | sr en | wr-ld | i/o | dac a | Address 0-15 | an/dig i/o | 3v3 | tx | gnd | Xonik Matrix Controller v1.0 | gnd | p5 | 3v3 | rx | t a1 | p4 | t a0 | t in | dig i/o | clk | out | in | clk | 3v3 | gnd | out | in | clk | 3v3 | gnd | in | out